# EAGLE board Opto_v1 (EAGLE 8.6.3)
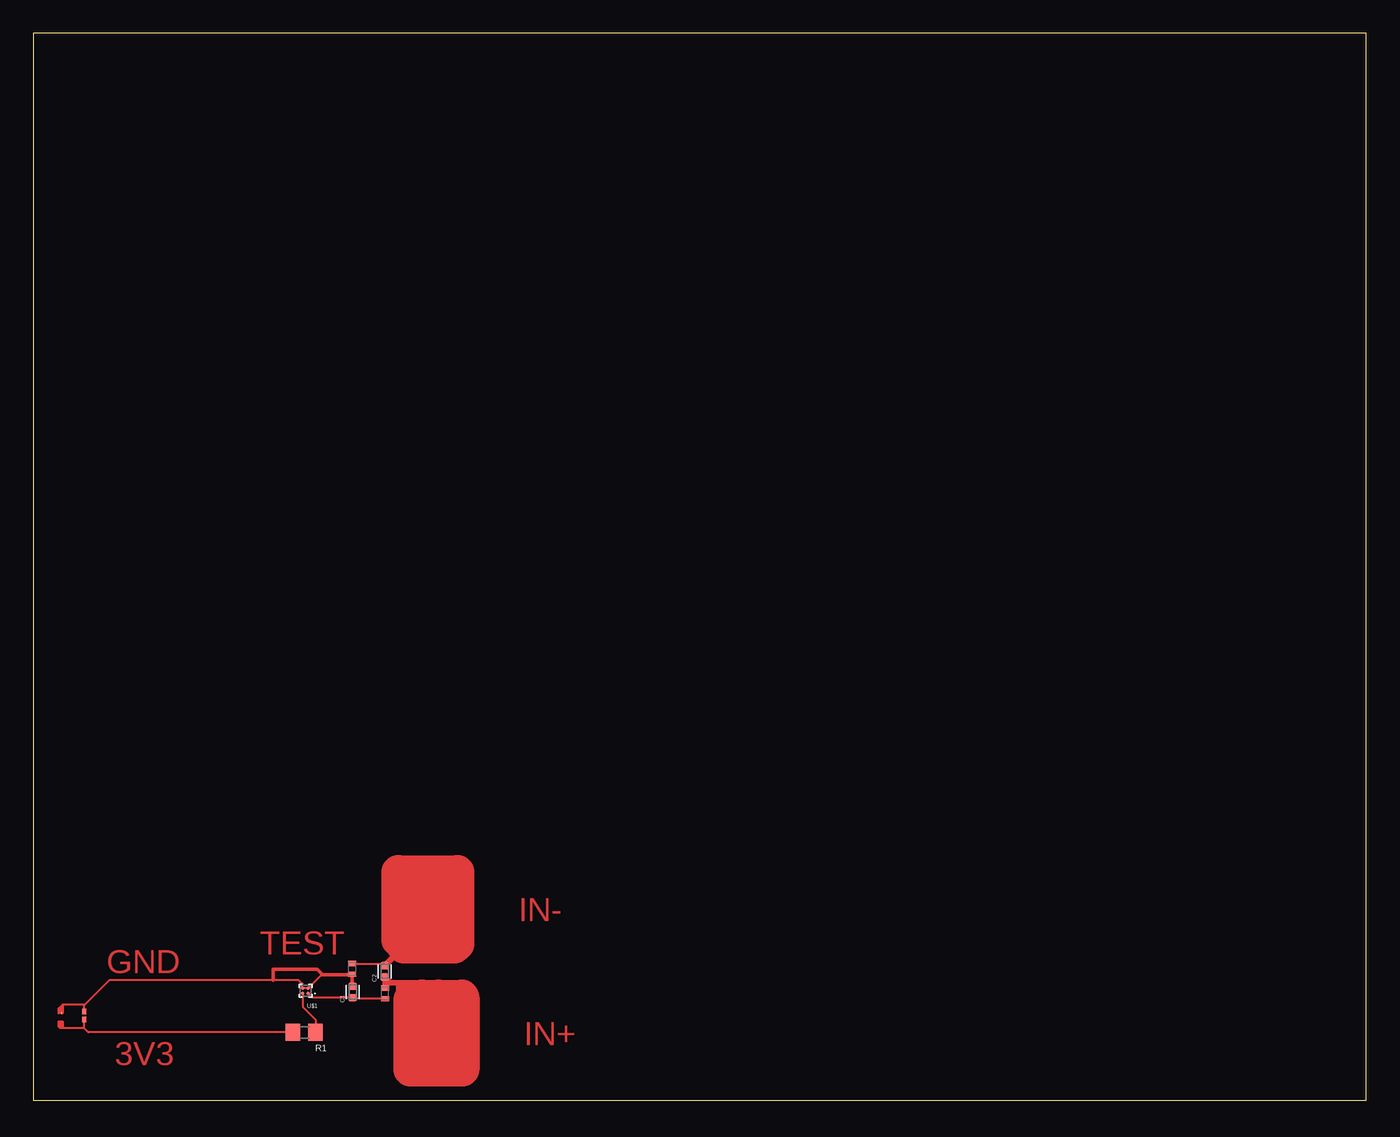
[diagram p0: board, top side]

Size 100 x 80 mm. Coordinates in mm from the lower left corner, seen from the top.
Outline: 0,0 100,0 100,80 0,80 0,0
Copper layers (1*16): Top 0.035mm / dielectric 1.5mm / Bottom 0.035mm
Design rules "default": minimum track width 6mil, minimum drill 0.35mm, track to track 6mil, track to pad 6mil, pad to pad 6mil, via to via 6mil, smd to smd 6mil, copper to edge 40mil, drill to drill 6mil, minimum pad ring 10mil, minimum via ring 8mil, stop-mask expansion 4mil, vias tented up to drill 0mil, thermal gap 10mil

## Footprints (pad centres in the part's own frame; a part is rotated, then mirrored left to right if it is on the bottom)
CAPC1005X55N = smd 0.54 x 0.6: 1 -0.43,0; 2 0.43,0
RESC1608X55 = smd 1.1 x 1.25: 1 -0.85,0; 2 0.85,0
BGA4C40P2X2_84X84X60N = smd 0.25 x 0.25: A1 -0.2,0.2; A2 0.2,0.2; B1 -0.2,-0.2; B2 0.2,-0.2
0402_MURATA = smd 0.4 x 0.6: P$1 -0.4,0; P$2 0.4,0
CREE-TR2227 = smd 0.4 x 0.3: P$1 -0.3,0; P$2 0.3,0

## Placement (x,y rotation side)
C1  AMK105BJ225MV-F  [CAPC1005X55N]  23.96,8.1 90 top
C2  AMK105BJ225MV-F  [CAPC1005X55N]  26.36,9.65 90 top
R1  CRCW06033K30FKEA  [RESC1608X55]  20.32,5.08 180 top
U$1  BGA4C4  [BGA4C40P2X2_84X84X60N]  20.42,8.19 180 top
U$2  SCHOTTKY0402  [0402_MURATA]  26.38,8 270 top
U$3  SCHOTTKY0402  [0402_MURATA]  23.92,9.83 90 top
U$4  CREE-TR2227  [CREE-TR2227]  3.81,6.35 90 top

## Library data of the parts
C1 C2 = AMK105BJ225MV-F; AVAILABILITY: Unavailable; DESCRIPTION: Cap Ceramic 2.2uF 4V X5R 20% SMD 0402 85°C T/R; MF: Taiyo Yuden; MP: AMK105BJ225MV-F; PACKAGE: 0402 Taiyo Yuden; PRICE: None
R1 = CRCW06033K30FKEA; DESCRIPTION: Res Thick Film 0603 3.3K Ohm 1% 0.1W_1/10W_ ?100ppm/C SMD Automotive Paper T/R; DIGI-KEY_PART_NUMBER: 541-3.30KHCT-ND; DIGI-KEY_PURCHASE_URL: https://www.digikey.com/product-detail/en/vishay-dale/CRCW06033K30FKEA/541-3.30KHCT-ND/1179866?utm_source=snapeda&utm_medium=aggregator&utm_campaign=symbol; MF: Vishay Dale; MP: CRCW06033K30FKEA; PACKAGE: 0603 Vishay
U$1 = LOD_BGA4C40P2X2_84X84X60N
U$2 U$3 = Schottki_0402
U$4 = CREE-TR2227

## Nets
GND: C1.2 U$1.B1 U$1.B2 U$3.P$1 U$4.P$2
IN+: C2.1 U$2.P$1
IN-: C2.2 U$3.P$2
N$1: R1.1 U$1.A2
N$2: R1.2 U$4.P$1
N$4: C1.1 U$1.A1 U$2.P$2

## Tracks (layer width: path | path; a pad name or v marks a point on that pad's centre or on a via)
GND  (1 unrouted)
  Top 0.152: U$4.P$2 3.81,7.11 3.85,7.15 | 23.9,9.43 21.66,9.43 21.61,9.38 U$1.B1 U$1.B2 20.17,8.34 20.17,8.73 19.9,9 18,9 5.7,9 3.85,7.15 | 23.9,9.43 U$3.P$1 | C1.2 23.9,8.59 23.9,9.43 | 3.85,7.15 2.2,7.15 | 2.2,7.15 2.2,6.5 2.1,6.5 1.9,6.5 1.9,6.85 1.98,6.92 2.02,6.97 2.2,7.15 | 2.1,6.6 2.1,6.9 2,6.8 2,6.6
  Top 0.254: 23.9,8.59 23.9,9.41 U$3.P$1 23.88,9.38 21.61,9.38 | 18,9 18,9.8 21.29,9.8 21.66,9.43
IN+
  Top 0.406: C2.1 26.78,8.8 | 27.4,8.8 26.78,8.8 | 29.3,8.8 29.1,8.8 | 26.78,8.8 26.68,8.8 26.38,9.1 U$2.P$1 | 29.1,8.8 29.6,8.3 29.6,2.8 29.4,2.6 29.15,2.85 | 29.1,2.9 27.4,4.6 27.4,8.8 | 27.4,8.8 29.1,8.8
  Top 1.016: 29.15,2.85 29.15,7.75 28.7,8.2 27.9,8.2 27.9,4.1 29.1,2.9 | 28.5,4.3 28.5,5.6 | 28.6,7.6 28.5,7.5 27.7,6.7 27.7,3.9 29.3,2.3 29.3,8.5
  Top 2.54: 28.5,5.6 28.5,7.5 28.3,7.5 28.3,2.29 32.2,2.29 32.2,7.7 32.15,7.75 30.4,7.75 | 29.15,7.75 30.4,7.75 | 30.4,7.75 30.4,3.8
IN-
  Top 0.152: U$3.P$2 26.21,10.23 C2.2
  Top 0.406: C2.2 27.08,10.8 29.3,10.8 29.3,12.3 29.3,14.3 29.1,14.5
  Top 1.016: 27.4,11.1 27.4,12 27.4,16.1 28.7,17.4 29.3,17.4 29.3,12.3 29.3,11.2 29.2,11.1
  Top 1.27: 29.1,13.8 29.1,14.5 29.1,15.7 29,15.8 28.3,15.1 28.3,14.6 | 29.1,13.8 29.1,11.6 29,11.5 27.8,11.5 27.8,14.1 28.3,14.6 | 28.5,14.8 28.3,14.6 | 28.3,14.6 28.3,12 | 29.1,13.8 28.4,14.5 27.8,14.5 27.8,16 28.1,16.3 29,16.3 29.1,16.2 29.1,11.3 27.7,11.3 27.6,11.4
  Top 2.54: 27.4,12 27.4,17.1 31.8,17.1 31.8,11.7 31.6,11.5 27.8,11.5 | 29.3,12.3 30.2,13.2 30.2,15.7
N$1
  Top 0.152: U$1.A2 20.22,6.98 21.17,6.03 R1.1
N$2
  Top 0.152: 3.81,5.39 U$4.P$1 | R1.2 4.12,5.08 3.81,5.39 | 3.81,5.39 2.01,5.39 1.9,5.5 1.9,5.9 2.2,5.9 2.2,5.5 2,5.5 2,5.7 | 2,5.7 2.1,5.8 2,5.8 2,5.7 | 2,5.7 2.1,5.6 2.1,5.7
N$4
  Top 0.152: C1.1 23.9,7.67 | 23.9,7.67 20.94,7.67 U$1.A1 | U$2.P$2 23.97,7.6 23.9,7.67

## Text on the board
Top: IN- | TEST | GND | IN+ | 3V3